# Altium PCB FC_Ver_0.PcbDoc
Units mm, origin at the board's own origin, x right, y up, seen from the top; angles counter-clockwise.
Board outline 50 x 57 mm, 2 copper layers (Top Layer, Bottom Layer); 17 components, 13 nets, 84 pads, 16 vias.
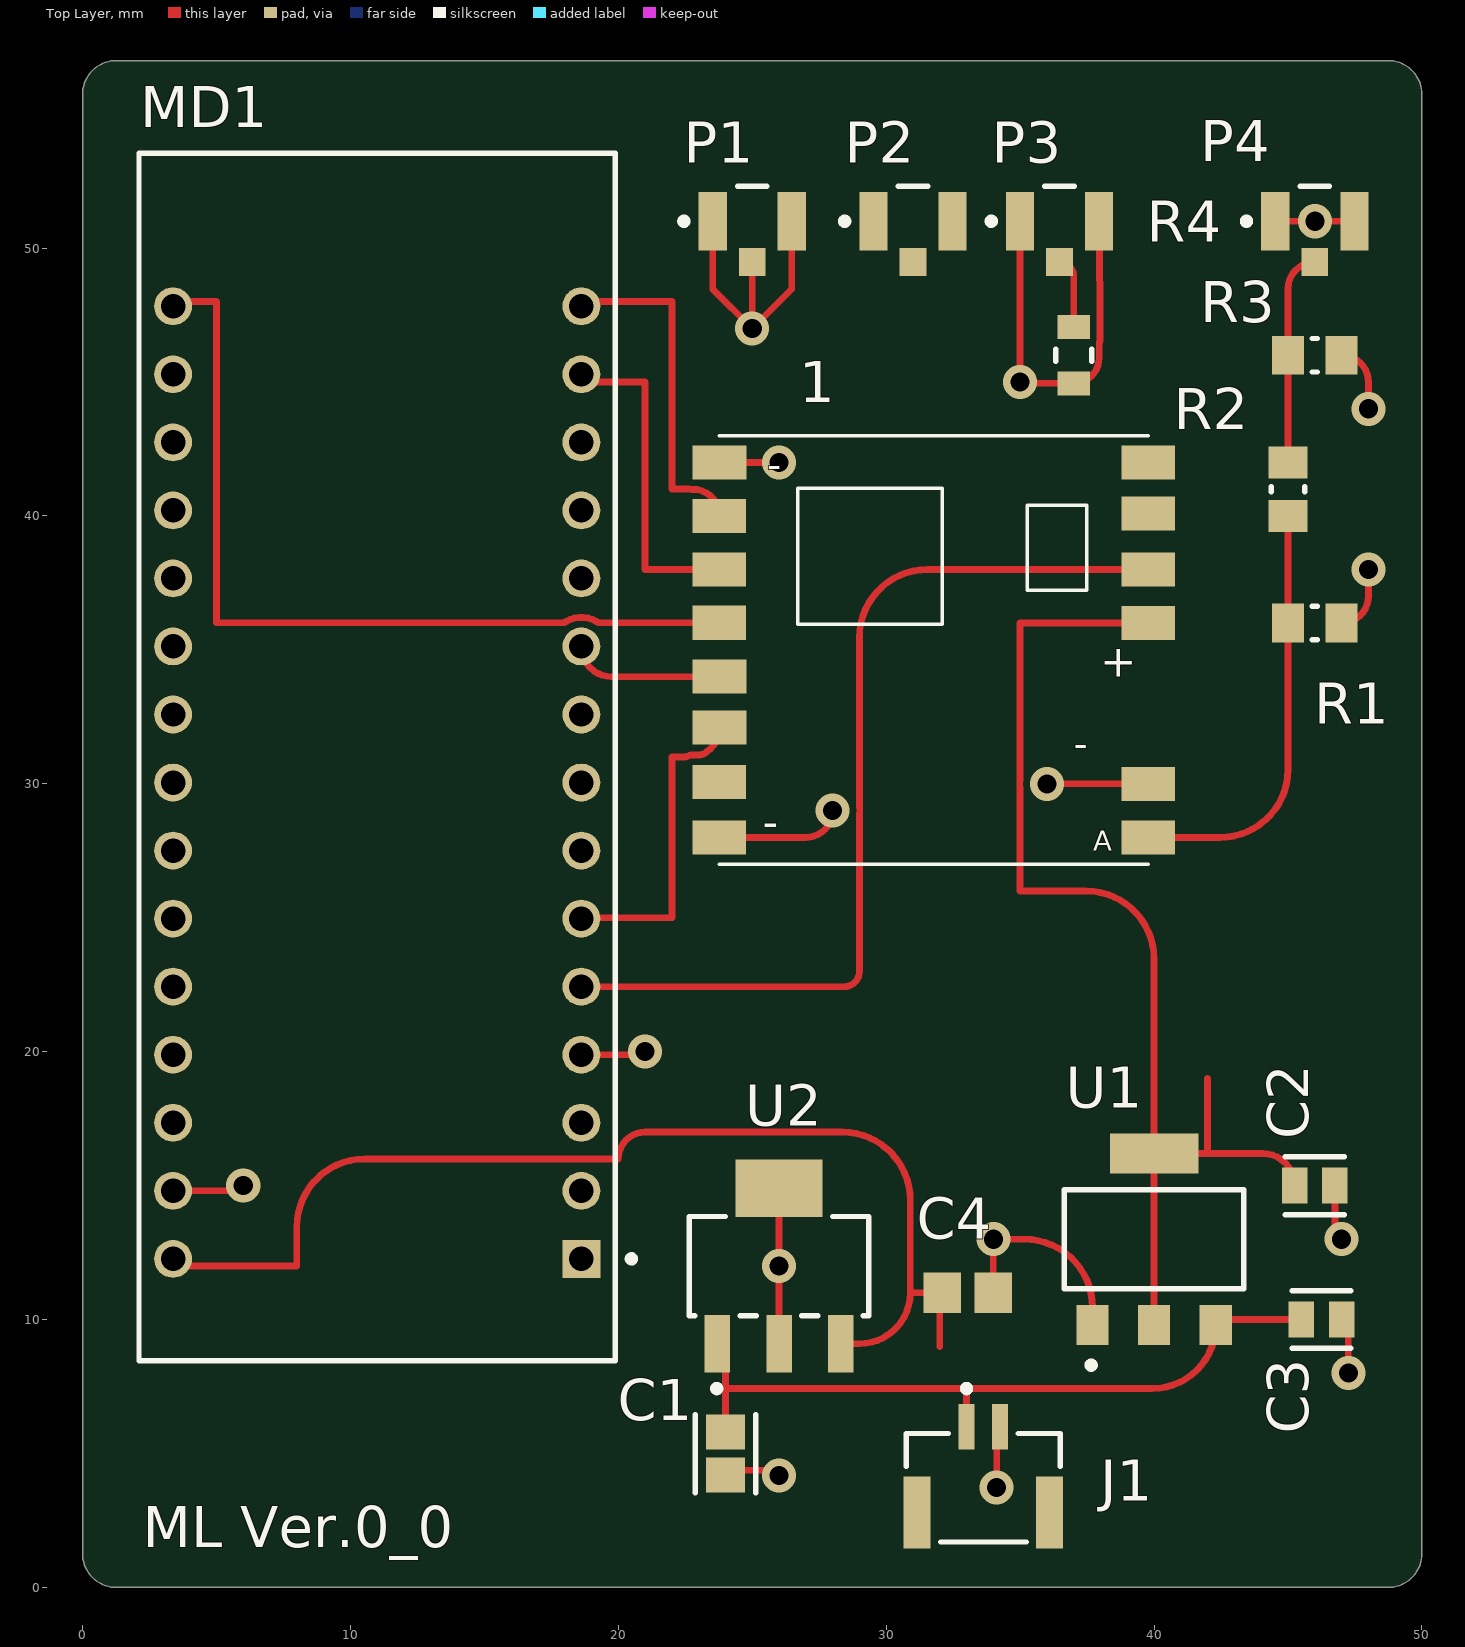
[diagram p0: Top Layer view]
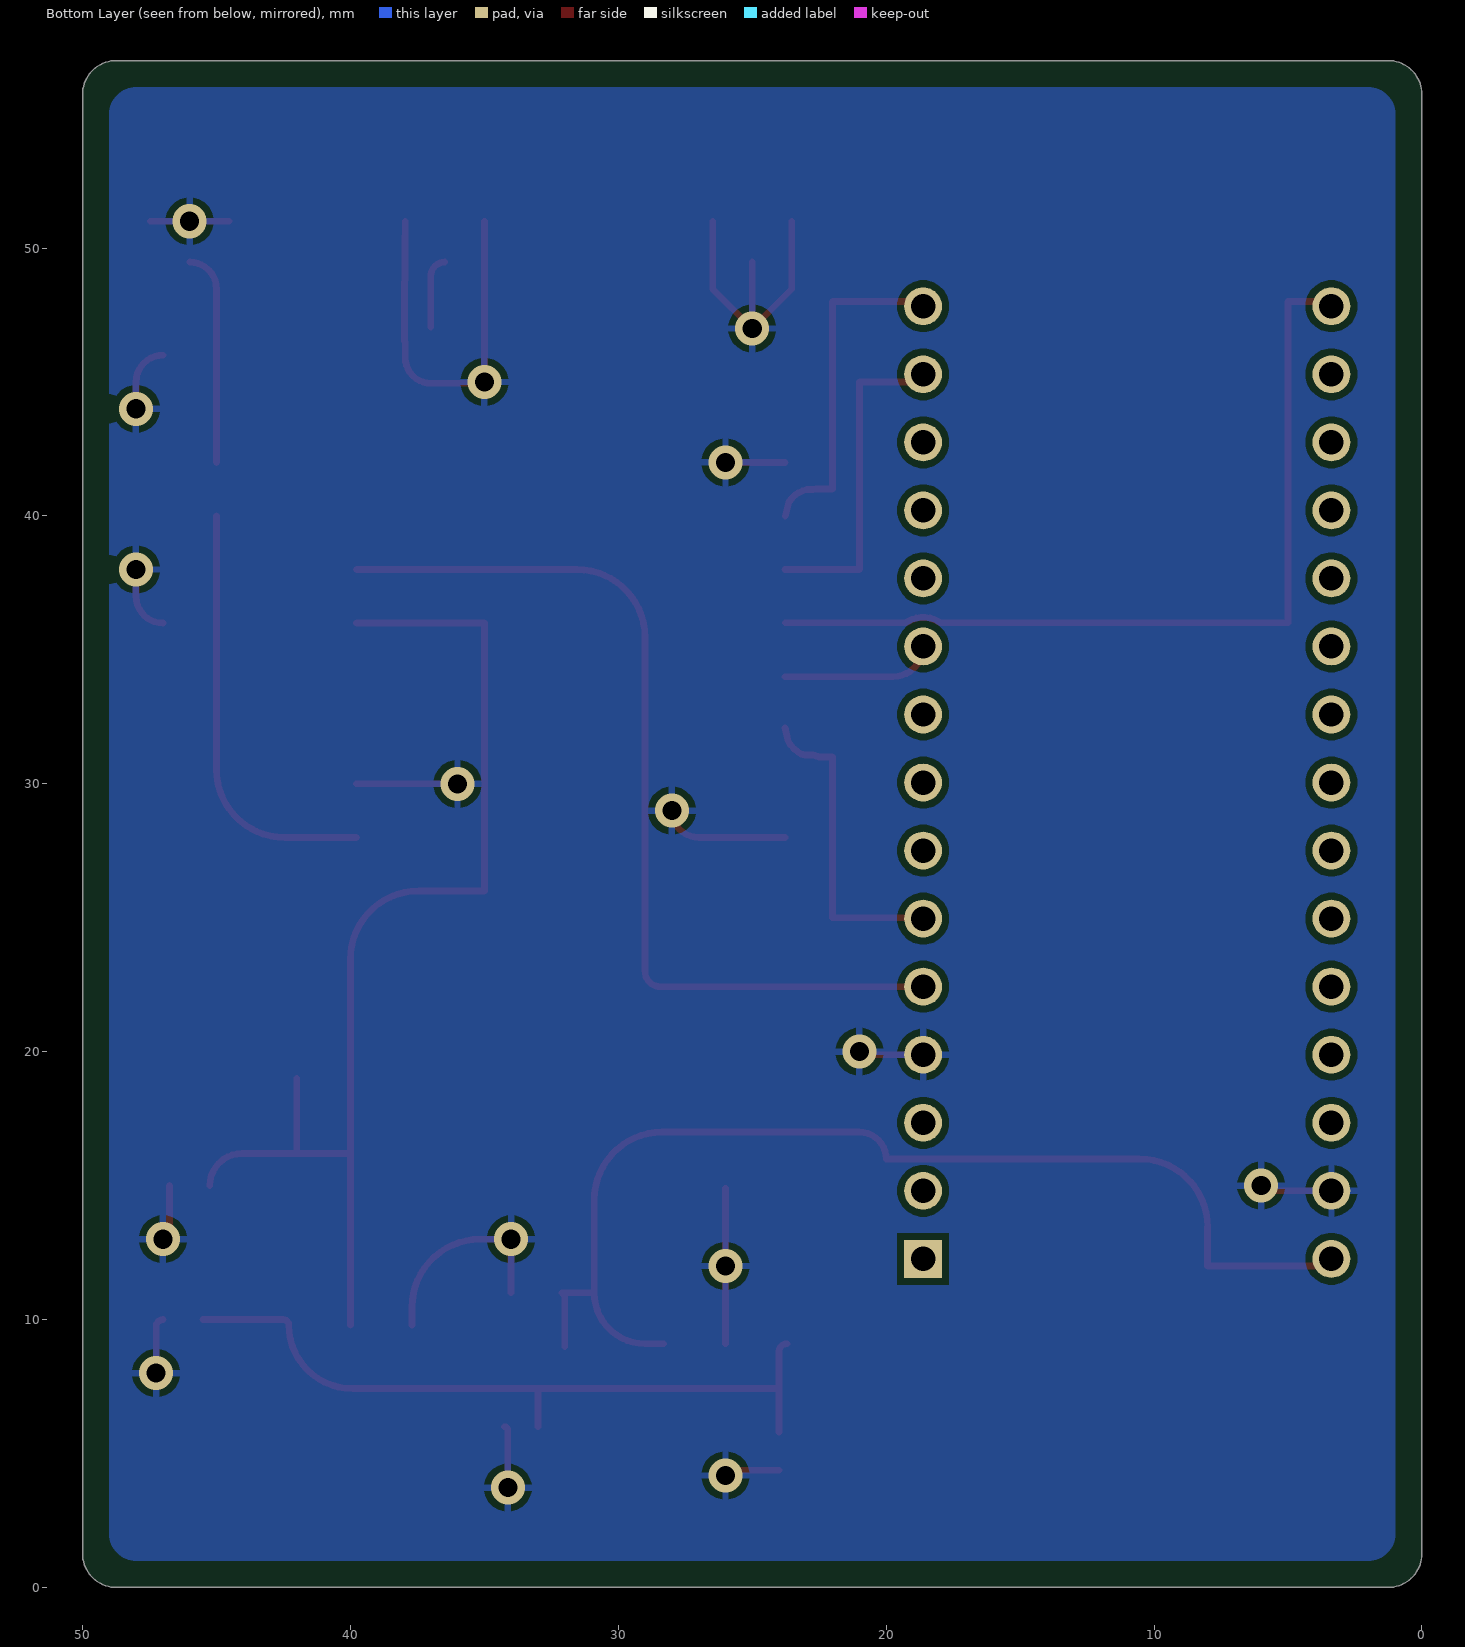
[diagram p1: Bottom Layer view, seen from below]
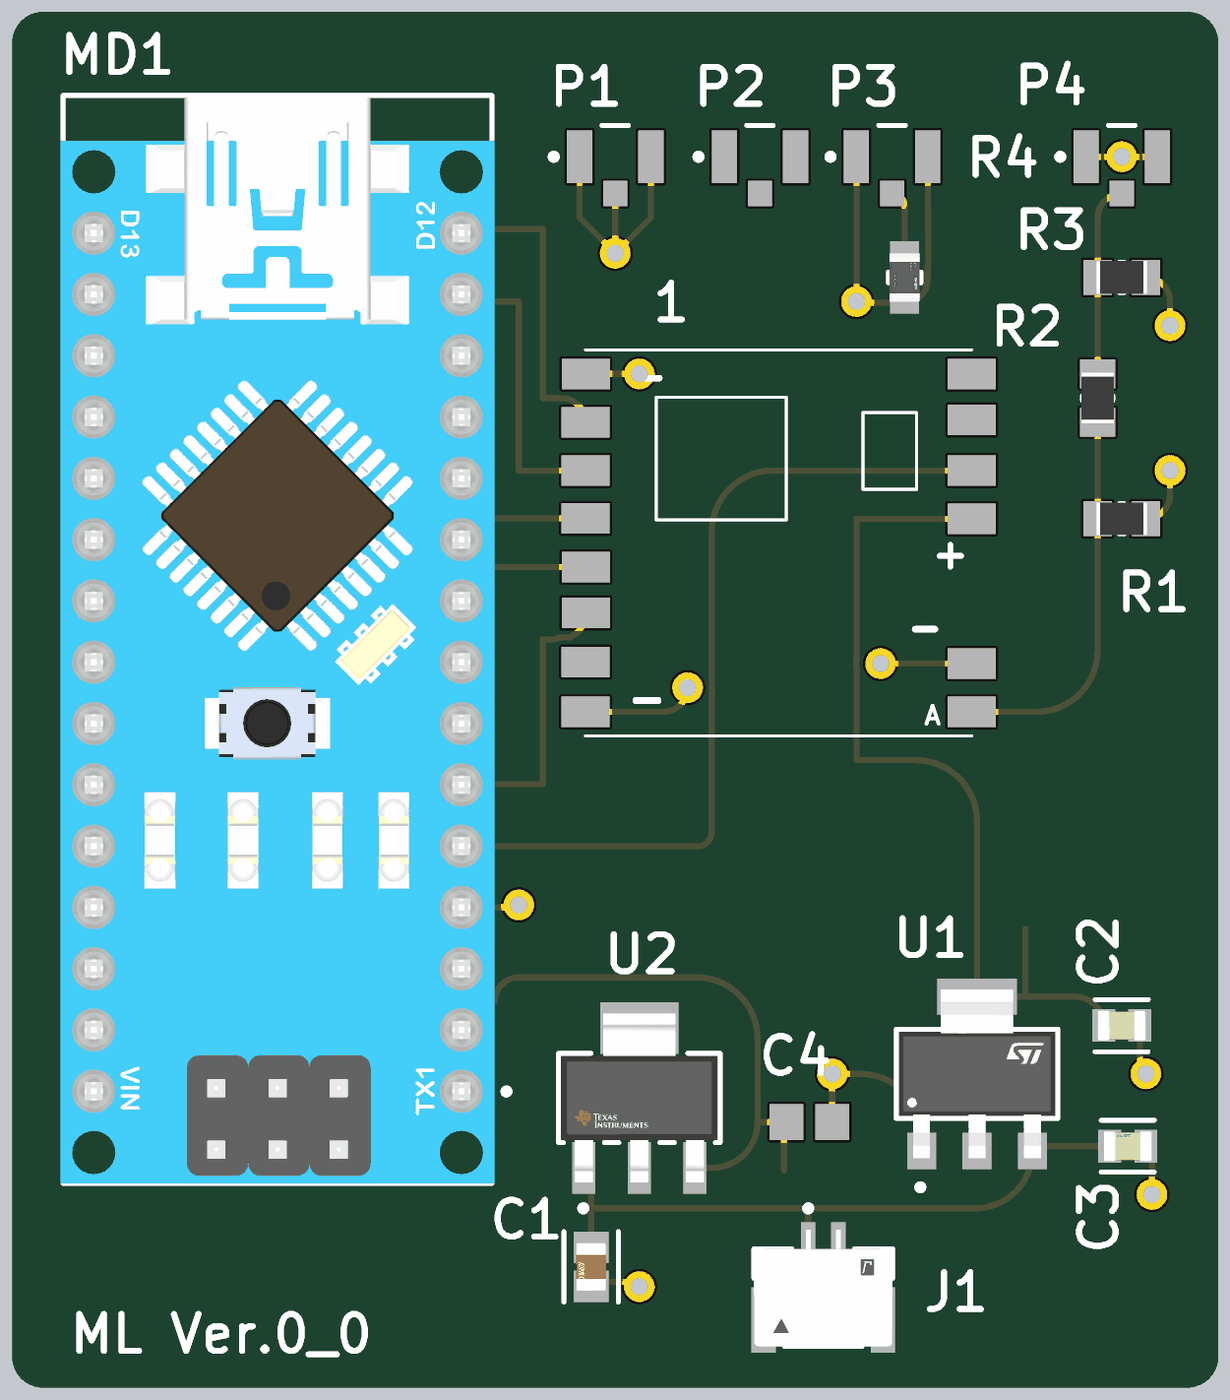
[diagram p2: 3D render of the assembled board from above, using the file's embedded part models]

## Layer stack, top to bottom
Top Solder: solder mask 0.0102, Solder Resist, Dk 3.5
Top Layer: signal copper 0.0356
Dielectric 1: dielectric 0.32, FR-4, Dk 4.8
Bottom Layer: signal copper 0.0356
Bottom Solder: solder mask 0.0102, Solder Resist, Dk 3.5

## Board outline
0,1.27 0,55.73 cw(c1.27,55.73) 1.27,57 48.73,57 cw(c48.73,55.73) 50,55.73 50,1.27 cw(c48.73,1.27) 48.73,0 1.27,0 cw(c1.27,1.27)

## Design rules (kind name [scope] priority, off if disabled: settings)
Clearance [All] p1: gap=0.254 ignorepadtopadclearanceinfootprint=FALSE
PolygonConnect [All] p1: connectstyle=Relief reliefconductorwidth=0.254 reliefentries=4 polygonreliefangle="90 Angle" airgapwidth=0.254
RoutingVias [All] p1: holewidth=0.711 width=1.27 viastyle="Through Hole" minholewidth=0.711 minwidth=1.27 maxholewidth=0.711 maxwidth=1.27
SolderMaskExpansion [All] p1: expansion=0.102 istentingtop=FALSE
SupplyNets "Schematic Supply Nets_3" [InNet('+12')] p1: voltage=0.000
SupplyNets "Schematic Supply Nets_2" [InNet('+3.3v')] p2: voltage=0.000
SupplyNets "Schematic Supply Nets_1" [InNet('+5v')] p3: voltage=0.000
SupplyNets "Schematic Supply Nets" [InNet('GND')] p4: voltage=0.000
Width [All] p1: maxlimit=0.254 minlimit=0.254 preferedwidth=0.254
30 further rules are at their usual default settings.

## Components (designator, comment, footprint, x,y, rotation, side; value= is the part's Value field where it differs from the comment)
1 "_C2H_RFM95" _C2H_RFM95 34,35 r0 top
C1 "08051C104KAT2A" FP-0805-L_2_01_0_2-W_1_25-IPC_B 24,5 r270 top
C2 "C0805C106K8PACTU" FP-C0805C-DG-MFG 46,15 r0 top value=10uF
C3 "C0805C224K5RACTU" FP-C0805C-DN-MFG 46.25,10 r0 top value="0.22 μF"
C4 "GRM21BR71H104KA01L" CAPC2013X135X45ML10T25 33.05,11 r0 top
J1 "SM02B-GHS-TB(LF)(SN)" FP-SM02B-GHS-TB_LF_SN-MFG 33.625,3.725 r0 top
MD1 "A000005" FP-A000005-MFG 11,31 r180 top
P1 "U.FL-R-SMT-1(01)" HRS-U.FL-R-SMT-3_V 25,51 r0 top
P2 "U.FL-R-SMT-1(01)" HRS-U.FL-R-SMT-3_V 31,51 r0 top
P3 "U.FL-R-SMT-1(01)" HRS-U.FL-R-SMT-3_V 36.475,51 r0 top
P4 "U.FL-R-SMT-1(01)" HRS-U.FL-R-SMT-3_V 46,51 r0 top
R1 "RC0805FR-071KL" RESC2013X60X35ML10T20 46,36 r0 top
R2 "RC0805FR-071KL" RESC2013X60X35ML10T20 45,41 r270 top
R3 "RC0805FR-071KL" RESC2013X60X35ML10T20 46,46 r180 top
R4 "RT0805FRE0722RL" FP-RT0805-MFG 37,46 r270 top value=22Ω
U1 "LD1117S33CTR" FP-SOT-223-0046067_14-MFG 40,13 r90 top
U2 "LM7805MP/NOPB" FP-DCY0004A-MFG 26,12 r90 top

## Footprints (in the part's own frame and the unit in brackets; to place one, negate y for a bottom-side part, rotate by r counter-clockwise, add the part's x,y. Pads: shape width x height; smd on the part's side, far side on the other; paste and mask are expansions set on the pad)
_C2H_RFM95 [mm]
  rect 2x1.27 smd: ANT(5.777,-7) DIO0(5.777,3) DIO1(5.78,5.095) DIO2(5.78,7) DIO5(-10.225,-4.936) GND(5.777,-5) GND1(-10.222,7) GND2(-10.23,-7) MISO(-10.23,5) MOSI(-10.225,3) NSS(-10.222,-1) RST(-10.222,-2.905) SCK(-10.23,1.012) VDD(5.777,1)
  silkscreen extent -10.23,-8 5.78,8
CAPC2013X135X45ML10T25 [mm] "Chip Capacitor, 2-Leads, Body 2.10x1.35mm, IPC Low Density"
  rect 1.4x1.5 smd: 1(-0.95,0) 2(0.95,0)
  body extent -1.05,-0.67 1.05,0.67, height 1.35
FP-0805-L_2_01_0_2-W_1_25-IPC_B [mm]
  rect 1.305x1.456 smd paste+0 mask+0: 1(-0.806,0) 2(0.806,0)
  silkscreen extent -1.46,-1.13 1.46,1.13, body extent -1.71,-0.98 1.71,0.98, height 0.25
FP-A000005-MFG [mil]
  rect 55.67x55.67 hole 35.98 paste-99999 mask+0: 1(-300,737.5)
  round 55.67 hole 35.98 paste-99999 mask+0: 2(-300,637.5) 3(-300,537.5) 4(-300,437.5) 5(-300,337.5) 6(-300,237.5) 7(-300,137.5) 8(-300,37.5) 9(-300,-62.5) 10(-300,-162.5) 11(-300,-262.5) 12(-300,-362.5) 13(-300,-462.5) 14(-300,-562.5) 15(-300,-662.5) 16(300,-662.5) 17(300,-562.5) 18(300,-462.5) 19(300,-362.5) 20(300,-262.5) 21(300,-162.5) 22(300,-62.5) 23(300,37.5) 24(300,137.5) 25(300,237.5) 26(300,337.5) 27(300,437.5) 28(300,537.5) 29(300,637.5) 30(300,737.5)
  silkscreen extent -379,-888 350,888, body extent -354,-891 354,891, height 10
FP-C0805C-DG-MFG [mm]
  rect 0.95x1.35 smd paste+0 mask+0: 1(-0.75,0) 2(0.75,0)
  silkscreen extent -1.11,-1.08 1.1,1.07, body extent -1.4,-0.85 1.4,0.85, height 0.25
FP-C0805C-DN-MFG [mm]
  rect 0.95x1.35 smd paste+0 mask+0: 1(-0.75,0) 2(0.75,0)
  silkscreen extent -1.1,-1.07 1.1,1.07, body extent -1.4,-0.85 1.4,0.85, height 0.25
FP-DCY0004A-MFG [mm]
  rect 2.15x0.95 smd paste+0 mask+0: 1(-2.9,2.3) 2(-2.9,0) 3(-2.9,-2.3)
  rect 2.15x3.25 smd paste+0 mask+0: 4(2.9,0)
  silkscreen extent -4.7,-3.35 1.85,3.35, body extent -4.08,-3.45 4.08,3.45, height 0.25
FP-RT0805-MFG [mm]
  rect 0.9x1.2 smd paste+0 mask+0: 1(-1.05,0) 2(1.05,0)
  silkscreen extent -0.23,-0.67 0.23,0.67, body extent -1.6,-0.77 1.6,0.77, height 0.25
FP-SM02B-GHS-TB_LF_SN-MFG [mm]
  rect 0.6x1.7 smd paste+0 mask+0: 1(-0.625,2.275) 2(0.625,2.275)
  rect 1x2.7 smd paste+0 mask+0: 3(-2.475,-0.925) 4(2.475,-0.925)
  silkscreen extent -2.88,-2.02 2.88,3.82, body extent -3.08,-2.37 3.08,3.22, height 0.25
FP-SOT-223-0046067_14-MFG [mm]
  rect 1.5x1.2 smd paste+0 mask+0: 1(-3.2,2.3) 2(-3.2,0) 3(-3.2,-2.3)
  rect 1.5x3.3 smd paste+0 mask+0: 4(3.2,0)
  silkscreen extent -4.82,-3.35 1.85,3.35, body extent -4.05,-3.45 4.05,3.45, height 0.25
HRS-U.FL-R-SMT-3_V [mm] "SMT, 3-Leads, Body 2.6x2.6mm"
  rect 1.05x2.2 smd: 1(-1.475,0) 2(1.475,0)
  rect 1x1.05 smd: 3(0,-1.525)
  silkscreen extent -2.67,-0.12 0.55,1.3, body extent -1.3,-1.3 1.3,1.3, height 1.25
RESC2013X60X35ML10T20 [mm] "Chip Resistor, 2-Leads, Body 2.1x1.35mm, IPC Low Density"
  rect 1.2x1.45 smd: 1(-1,0) 2(1,0)
  silkscreen extent -0.1,-0.63 0.1,0.63, body extent -1.05,-0.68 1.05,0.67, height 0.6

## Part data
C1: library part CMP-2007-04174-2, "General Purpose Ceramic Capacitor, 0805, 100nF, 10%, X7R, 15%, 100V", Capacitance=100nF, Case Code (Imperial)=0805, Case Code (Metric)=2012, Dielectric=X7R, Dielectric Material=Ceramic, Max Operating Temperature=125°C, Min Operating Temperature=-55°C, Package Quantity=2000, Tolerance=10%, Voltage=100V, Case/Package=0805, Construction=Flat, Contact Plating=Tin, Depth=1.25mm, Height=1.4mm, Lead Free="Lead Free", Length=2.01mm, Mount="Surface Mount", Number of Pins=2, Packaging="Tape and Reel", Radiation Hardening=No, REACH SVHC="No SVHC", RoHS Compliant=Yes, Series=-, Termination=SMD/SMT, Thickness=0.055inch, Voltage Rating=100V, Voltage Rating (DC)=100V, Width=0.049inch
C2: library part CMP-2007-03243-2, "CAP CER 10UF 10V X5R 0805", 3DS Part Number=220-00001, Capacitance=10uF, Manufacturer=Kemet, Package=C0805C-DG, Temperature="-55°C to +85°C", Temperature Characteristic=X5R, Temperature Coefficient=15%, Temperature Range High=+85°C, Temperature Range Low=-55°C, Tolerance=10%, Voltage=10V, Automotive=No, Category=Cap, ComponentLink2Description=Datasheet, ComponentLink2URL=https://content.kemet.com/datasheets/KEM_C1006_X5R_SMD.pdf, Device Class L1="Passive Components", Device Class L2=Capacitors, Device Class L3="Ceramic Capacitors", Digikey Description="CAP CER 10UF 10V X5R 0805", Height=1.4mm, Ipc Land Pattern Name=CAPC200125X125, Lead Free=Yes, Manufacturer Part Number=C0805C106K8PACTU, Material=Ceramic, Mouser Description="CAP CER 10UF 10V X5R 0805", Octopart=https://octopart.com/c0805c106k8pactu-kemet-98697, RoHS=TRUE, Voltage Rating=10V
C3: library part CMP-1036-04552-2, "CAP CER 0.22UF 50V X7R 0805", Capacitance="0.22 μF", Manufacturer=KEMET, Package=C0805C-DN, Temperature="-55°C to +125°C", Temperature Characteristic=X7R, Temperature Coefficient=30ppm/°C, Temperature Range High=+125°C, Temperature Range Low=-55°C, Tolerance=0.1, Voltage Rating="50 V", Automotive=No, Category=Cap, ComponentLink2Description=Datasheet, ComponentLink2URL=https://content.kemet.com/datasheets/KEM_C1003_C0G_SMD.pdf, Device Class L1="Passive Components", Device Class L2=Capacitors, Device Class L3="Ceramic Capacitors", Digikey Description="CAP CER 0.22UF 50V X7R 0805", Height=0.88mm, Ipc Land Pattern Name=CAPC200125X78, Lead Free=Yes, Manufacturer Part Number=C0805C224K5RACTU, Material=Ceramic, Mouser Description="CAP CER 0.22UF 50V X7R 0805", Octopart=https://octopart.com/c0805c224k5ractu-kemet-144670, RoHS=TRUE
C4: library part CMP-2100-03644-1, "Chip Capacitor, 0.1 uF, +/- 10%, 50 V, -55 to 125 degC, 0805 (2012 Metric), RoHS, Tape and Reel", Capacitance=100nF, Case Code (Imperial)=0805, Case Code (Metric)=2012, Dielectric=X7R, Dielectric Material=Ceramic, Insulation Resistance=10GR, Manufacturer=Murata, Max Operating Temperature=125degC, Min Operating Temperature=-55degC, Package Description="2-Pin Surface Mount Device, Body 2 x 1.25 mm", Package Quantity=1, Tolerance=10%, Voltage=50V, Case/Package=0805, Datasheet URL=http://psearch.en.murata.com/capacitor/product/GRM21BR71H104KA01%23.pdf, Datasheet Version=42675.0, Depth=1.25mm, Height=1.25mm, Lead Free=LeadFree, Length=2mm, Manufacturer URL=http://www.murata.com/, Material=Ceramic, Mount=SurfaceMount, Number of Pins=2, Package Reference=0805, Packaging=TapeandReel, Radiation Hardening=No, REACH SVHC=Unknown, RoHSCompliant=true, Termination=SMD/SMT, Thickness=0.053inch, Voltage Rating=50V, Voltage Rating (DC)=50V, Width=0.049inch
J1: library part CMP-2000-07076-2, "CONN HEADER SMD R/A 2POS 1.25MM", Color=Natural, Current Rating=1A, Package Quantity=2500, Voltage Rating=50V, Connector Type="Outer Shroud Contact", Contact Material=Bronze, Contact Plating=Tin, Contact Type="Male Pin", Fastening Type=Latch, Housing Color=Natural, Housing Material=Nylon, Lead Free="Lead Free", Mount="Surface Mount", Number of Contacts=2, Number of Positions=2, Number of Rows=1, Orientation="Right Angle", Packaging="Tape and Reel", Pitch=0.049inch, Series=GH, Termination=Solder
MD1: library part CMP-189986-000002-1, "ARDUINO NANO ATMEGA328 EVAL BRD", Operating Supply Voltage=12V, Package Quantity=50, Core Architecture=AVR, Data Bus Width=8b, Evaluation Kit=Yes, Height=0.25inch, Interface=I2C, Length=7inch, Number of Bits=8, Packaging=Bulk, REACH SVHC="No SVHC", Series="AVR® ATmega", Weight=0.358383oz, Width=5inch
P1 P2 P3 P4: library part CMP-2000-05153-1, "Ultra Small Coaxial Connector, 6 GHz, -40 to 90 degC, 3-Pin SMD, RoHS, Bulk", Dielectric Material=LiquidCrystalPolymer(LCP), Frequency - Max=6GHz, Housing Color=Silver, Manufacturer="Hirose Electric", Operating Temperature=-40degC~90degC, Package Description="3-Pin Surface Mount Device, Body 2.6 x 2.6 mm", Package Reference=U.FL-R-SMT, Standard Package=100, Body Finish=Silver, Body Material=PhosphorBronze, Category=Connectors,Interconnects, Center Contact Material=PhosphorBronze, Center Contact Plating=Gold, Connector Style=U.FL, Connector Type=Jack,MalePin, Contact Termination=Solder, Datasheet URL=https://datasheet.ciiva.com/26945/getdatasheetpartid-475239-26945414.pdf, Datasheet Version=Feb-09, Dynamic Catalog=U.FLSeries, Family=CoaxialConnectors(RF), Fastening Type=Snap-On, Featured Product=HiroseU.FLSeries, Impedance=50Ohm, Manufacturer URL=https://www.hirose.com, Minimum Quantity=UltraMiniatureCoaxial, Mounting Type=SurfaceMount, Online Catalog=U.FLSeries, Other Names="H122041 / U.FL-R-SMT-1(01)-ND", Packaging=Bulk, Quantity Available=Bulk, Series=U.FL, Shield Termination=Solder, Unit PriceUSD=U.FL
R1 R2 R3: library part CMP-2100-03671-1, "Chip Resistor, 1 KOhm, +/- 1%, 125 mW, -55 to 155 degC, 0805 (2012 Metric), RoHS, Tape and Reel", Case Code (Imperial)=0805, Case Code (Metric)=2012, Manufacturer=Yageo, Max Operating Temperature=155degC, Max Power Dissipation=125mW, Min Operating Temperature=-55degC, Package Description="2-Pin Surface Mounted Device, Body 2 x 1.25 mm", Package Quantity=1, Resistance=1KOhm, Temperature Coefficient=100ppm/degreesC, Tolerance=1%, Voltage Rating=150V, Case/Package=0805, Composition=ThickFilm, Datasheet URL=http://www.yageo.com/NewPortal/yageodocoutput?fileName=/pdf/R-Chip/PYu-RC_Group_51_RoHS_L_5.pdf, Datasheet Version="Rev. 5, 10/2016", Depth=1.25mm, Height=0.024inch, Lead Free=LeadFree, Length=0.079inch, Manufacturer URL=http://www.yageo.com/, Military Standard=Not, Number of Pins=2, Number of Terminations=2, Package Reference=0805, Packaging=TapeandReel, Power Rating=125mW, REACH SVHC=Unknown, RoHSCompliant=true, Termination=SMD/SMT, Voltage Rating (DC)=150V, Width=0.049inch
R4: library part CMP-03412-009509-1, "RES SMD 22 OHM 1% 1/8W 0805", Manufacturer=Yageo, Package=RT0805, Power Rating=0.125W, Resistance=22Ω, Temperature="-55°C to +155°C", Temperature Coefficient="50 ppm/°C", Temperature Range High=+155°C, Temperature Range Low=-55°C, Tolerance=0.0001, Voltage Rating=150V, Automotive=No, Category=Res, ComponentLink2Description=Datasheet, ComponentLink2URL=http://www.yageo.com/documents/recent/PYu-RT_1-to-0.01_RoHS_L_9.pdf, Composition="Thin Film", Device Class L1="Passive Components", Device Class L2=Resistors, Device Class L3="Chip SMD Resistors", Digikey Description="RES SMD 22 OHM 1% 1/8W 0805", Footprint Url=http://www.yageo.com/exep/pages/download/literatures/PYu-R_Mount_10.pdf, Height=0.6mm, Ipc Land Pattern Name=RESC200125X50, Lead Free=Yes, Manufacturer Part Number=RT0805FRE0722RL, Mouser Description="Thin Film Resistors - SMD 1/8W 22 ohm 1% 50ppm", Octopart=https://octopart.com/rt0805fre0722rl-yageo-39984181, RoHS=TRUE, Series=RT
U1: library part CMP-0244-00307-2, "IC REG LINEAR 3.3V 800MA SOT223", Case/Package=SOT-223, Dropout Voltage=1.1V, Input Bias Current=5mA, Max Input Voltage=15V, Max Operating Temperature=125°C, Max Output Current=1.3A, Max Output Voltage=3.3V, Max Power Dissipation=12W, Min Input Voltage=5.3V, Min Operating Temperature=-40°C, Output Current=950mA, Output Voltage Accuracy=1%, Package Quantity=1, Quiescent Current=10mA, Accuracy=1%, Contact Plating=Tin, Height=1.8mm, Lead Free="Lead Free", Length=6.5mm, Max Supply Voltage=15V, Min Output Voltage=3.3V, Min Supply Voltage=3.3V, Mount="Surface Mount", Nominal Output Voltage=3.3V, Number of Outputs=1, Number of Pins=4, Number of Regulators=1, Number of Terminals=4, Output Type=Fixed, Output Voltage=3.3V, Packaging="Tape and Reel", Polarity=Positive, Power Dissipation=12W, Radiation Hardening=No, REACH SVHC="No SVHC", Termination=SMD/SMT, Weight=0.01lb, Width=3.5mm
U2: library part CMP-04917-000007-1, "IC REG LINEAR 5V 1.5A SOT223-4", Dropout Voltage=2V, Manufacturer="Texas Instruments", Max Junction Temp=+150°C, Max Supply Voltage=30V, Min Supply Voltage=7.5V, Nominal Supply Current=8mA, Output Current=1.5A, Output Voltage=5V, Package=DCY0004A, Temperature="0°C to +125°C", Temperature Range High=+125°C, Temperature Range Low=0°C, Accuracy Percentage=3%, Automotive=No, Category=IC, ComponentLink2Description=Datasheet, ComponentLink2URL=http://www.ti.com/lit/ds/symlink/lm7800.pdf, Device Class L1="Integrated Circuits (ICs)", Device Class L2="Power Management ICs", Device Class L3="Voltage Regulators - Linear", Digikey Description="IC REG LINEAR 5V 1.5A SOT223-4", Height=1.8mm, Lead Free=Yes, Manufacturer Part Number=LM7805MP/NOPB, Number of Outputs=1, Octopart=https://octopart.com/lm7805mp%2Fnopb-texas+instruments-74629991, Output Type=Fixed, RoHS=TRUE, Standoff Height=0.02mm
1: DeviceSetName=_C2H_RFM95, GateName_1=G$1, LibraryName=AmbaSat-1v1-01-NO-solar, Package=_C2H_RFM95, SymbolName_1=_C2H_RFM95

## Via types
v1: diameter 1.27, hole 0.711, Top Layer to Bottom Layer, 16 vias

## Nets (pads, with @x,y where several pads share a name; then routed paths per layer and width w, separated by ;. In a path a pad name is that pad's centre, name@x,y a point inside that pad or via, vN(x,y) a via of type N, cw(c..) or ccw(c..) an arc to the next point about the centre after c; other vN are vias at no path point)
+3.3v: 1.VDD C2.1 U1.2 U1.4 | length 43.6
  Top Layer w0.254: 1.VDD 35,36 35,30.201 cw(c34.746,30.201) 34.997,30.161 ccw(c36,30) 34.997,29.84 cw(c34.746,29.799) 35,29.799 35,26 37.46,26 cw(c37.46,23.46) 40,23.46 U1.4 ; U1.2 U1.4 ; 42,19 42,16.225 42.025,16.2 ; C2.1 ccw(c44.05,15) 44.05,16.2 42.025,16.2 ; U1.4 42.025,16.2
+5v: C4.1 MD1.30 U2.3 | length 43
  Top Layer w0.254: MD1.30 ccw(c3.647,12.267) 3.647,12 8,12 8,13.46 cw(c10.54,13.46) 10.54,16 20,16 cw(c21,16) 21,17 28.36,17 cw(c28.36,14.46) 30.9,14.46 30.9,11 ; U2.3 29,9.1 ccw(c29,11) 30.9,11 ; 32,9 32,10.9 C4.1 30.9,11
+12: C1.1 C3.1 J1.1 U1.3 U2.1 | length 27.9
  Top Layer w0.254: U2.1 cw(c23.7,8.8) 24,8.8 24,7.303 ; C1.1 24,7.303 ; J1.1 33,7.425 ; C3.1 42.5,10 ccw(c42.5,9.8) U1.3 cw(c39.925,9.8) 39.925,7.425 33,7.425 ; 24,7.303 cw(c24.122,7.303) 24.122,7.425 33,7.425
ANT: 1.ANT R1.1 R2.2 | length 16.1
  Top Layer w0.254: 1.ANT 42.46,28 ccw(c42.46,30.54) 45,30.54 R1.1 R2.2
CS: 1.NSS MD1.10 | length 5.8
  Top Layer w0.254: MD1.10 ccw(c19.747,35.127) 19.747,34 1.NSS
DIO0: 1.DIO0 MD1.5 | length 35.4
  Top Layer w0.254: MD1.5 28.427,22.427 ccw(c28.427,23) 29,23 29,28.8 cw(c29.254,28.799) 29.003,28.838 ccw(c28,29) 29.003,29.162 cw(c29.254,29.201) 29,29.2 29,35.46 cw(c31.54,35.46) 31.54,38 1.DIO0
GND: 1.GND 1.GND1 1.GND2 C1.2 C2.2 C3.2 C4.2 J1.2 MD1.4 MD1.29 P1.1 P1.2 P1.3 P3.1 P3.2 P4.1 P4.2 R1.2 R3.1 R4.2 U1.1 U2.2 U2.4 | length 72.7
  Top Layer w0.254: MD1.29 5.807,14.807 ccw(c5.807,15) v1(6,15) ; MD1.4 20.887,19.887 ccw(c20.887,20) v1(21,20) ; P1.1 23.525,48.475 v1(25,47) ; 1.GND2 27,28 ccw(c27,29) v1(28,29) ; 1.GND1 v1(26,42) ; C1.2@24,4.376 25.806,4.376 cw(c25.806,4.182) v1(26,4.182) ; P1.3 v1(25,47) ; U2.2 v1(26,12) U2.4 ; P1.2 26.475,48.475 v1(25,47) ; C4.2 v1(34,13) 35.16,13 cw(c35.16,10.46) 37.7,10.46 U1.1 ; v1(34.125,3.725) 34.125,5.875 cw(c34.25,5.875) J1.2 ; P3.1 v1(35,45) ccw(c35.05,45) 35.05,44.95 R4.2 ccw(c37,45.9) 37.95,45.9 37.95,46.405 cw(c38.204,46.404) 37.962,46.482 ccw(c37.6,46.6) 37.981,46.6 37.981,47.5 ccw(c37.6,47.5) 37.981,47.505 37.959,50.027 P3.2 ; v1(36,30) 1.GND ; P4.1 P4.2 ; C2.2 46.75,13.25 ccw(c47,13.25) v1(47,13) ; C3.2 cw(c47,9.75) 47.25,9.75 v1(47.25,8) ; R1.2 ccw(c47,37) 48,37 v1(48,38) ; R3.1 cw(c47,45) 48,45 v1(48,44)
  other v1: 46,51
MISO: 1.MISO MD1.15 | length 12.8
  Top Layer w0.254: MD1.15 cw(c18.792,47.827) 18.792,48 22,48 22,41 22.637,41 cw(c22.636,40.746) 22.692,40.994 ccw(c22.778,41.365) 22.778,40.984 22.925,40.984 cw(c22.924,40.73) 22.975,40.979 cw(c22.77,40) 23.631,40.508 1.MISO
MOSI: 1.MOSI MD1.14 | length 12.3
  Top Layer w0.254: MD1.14 ccw(c18.907,45.287) 18.907,45 21,45 21,38 1.MOSI
NetP3_3: P3.3 R4.1 | length 2.7
  Top Layer w0.254: P3.3 cw(c36.475,48.95) 37,48.95 R4.1
NetP4_3: P4.3 R2.1 R3.2 | length 8
  Top Layer w0.254: R2.1 R3.2 45,48.475 cw(c46,48.475) P4.3
RST: 1.RST MD1.6 | length 11.8
  Top Layer w0.254: MD1.6 cw(c18.652,24.967) 18.652,25 22,25 22,31 22.469,31 ccw(c22.468,31.254) 22.59,31.031 cw(c22.775,30.699) 22.775,31.08 23.041,31.08 ccw(c23.039,31.334) 23.146,31.103 ccw(c22.683,32.095) 23.653,31.587 1.RST
SCK: 1.SCK MD1.16 | length 32.6
  Top Layer w0.254: MD1.16 cw(c3.552,47.827) 3.552,48 5,48 5,36.012 17.911,36.012 ccw(c17.91,36.266) 18.043,36.05 cw(c18.62,35.127) 19.197,36.05 ccw(c19.33,36.266) 19.329,36.012 1.SCK
pads on no net: 1.DIO1 1.DIO2 1.DIO5 J1.3 J1.4 MD1.1 MD1.2 MD1.3 MD1.7 MD1.8 MD1.9 MD1.11 MD1.12 MD1.13 MD1.17 MD1.18 MD1.19 MD1.20 MD1.21 MD1.22 MD1.23 MD1.24 MD1.25 MD1.26 MD1.27 MD1.28 P2.1 P2.2 P2.3

## Polygon pours and split planes (outlines as drawn)
GND on Bottom Layer "GND_L02_P000" (solid, remove dead copper, pour order 0): 2,1 cw(c2,2) 1,2 1,55 cw(c2,55) 2,56 48,56 cw(c48,55) 49,55 49,2 cw(c48,2) 48,1

## Silkscreen, mask and mechanical layers (free items; w line width, h text height)
Top Overlay:
  text "ML Ver.0_0" at 2.254,1.508 h1.52

## Text inside footprints (layer, text, board x,y; h text height)
1: Top Overlay "-" at 25.567,41.401 h1.08; Top Overlay "-" at 25.385,28 h1.19; Top Overlay "-" at 37,31 h1.08; Top Overlay "A" at 37.732,27.497 h0.76; Top Overlay "+" at 38,34 h1.19